# Altium PCB DC_AC_Converter.PcbDoc
Units mm, origin at the board's own origin, x right, y up, seen from the top; angles counter-clockwise.
Board outline 255.27 x 136.27 mm, 2 copper layers (Top Layer, Bottom Layer); 65 components, 30 nets, 160 pads, 2 vias.
Unrouted connection lines stored in the file: 12.
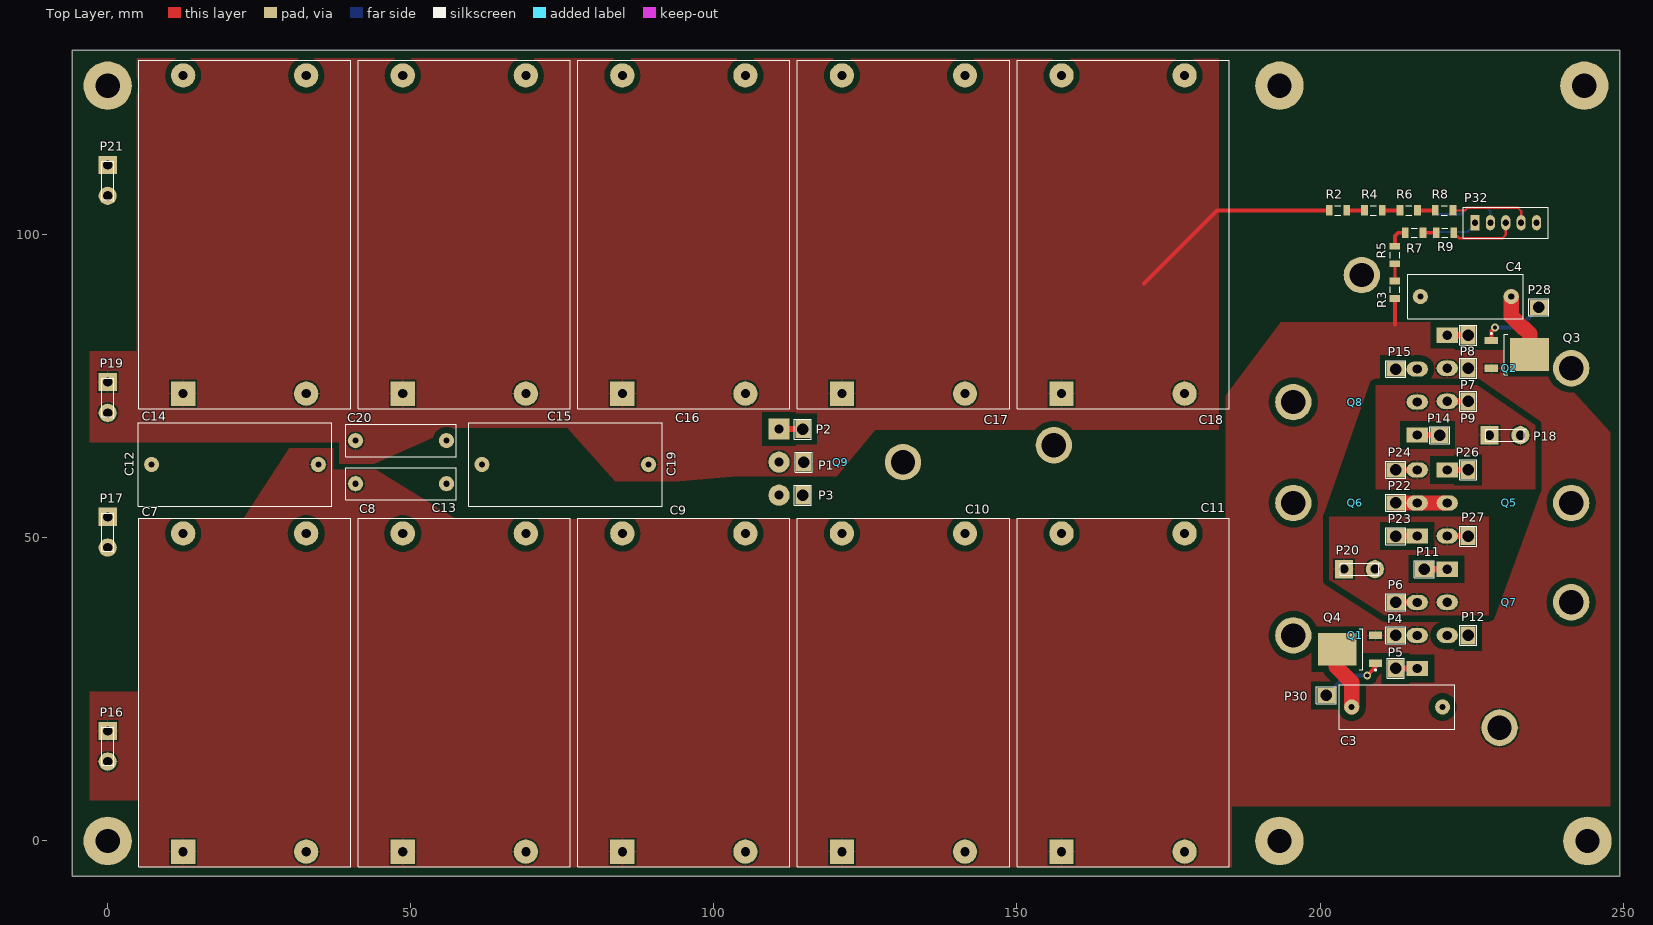
[diagram p0: Top Layer view]
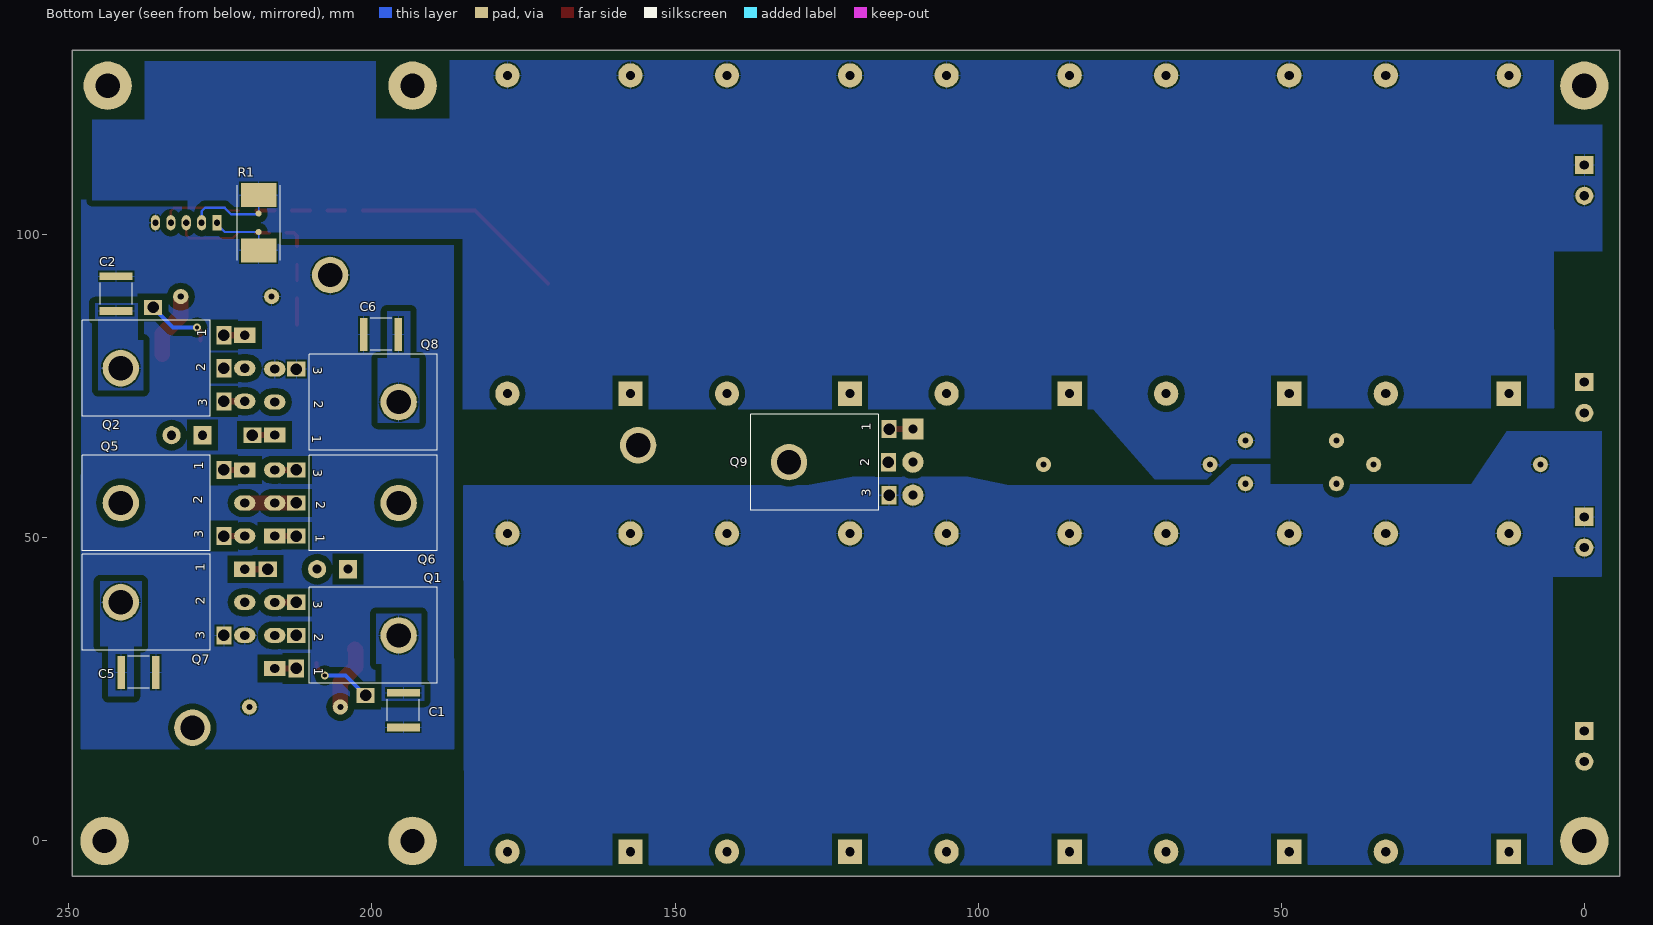
[diagram p1: Bottom Layer view, seen from below]

## Layer stack, top to bottom
Top Solder: solder mask 0.0102, Solder Resist, Dk 3.5
Top Layer: signal copper 0.0356
Dielectric1: dielectric 0.32, FR-4, Dk 4.8
Bottom Layer: signal copper 0.0356
Bottom Solder: solder mask 0.0102, Solder Resist, Dk 3.5

## Board outline
-5.842,130.429 -5.842,-5.842 249.428,-5.842 249.428,130.429

## Design rules (kind name [scope] priority, off if disabled: settings)
Clearance [All] p1: gap=1.016 ignorepadtopadclearanceinfootprint=FALSE except(0: Arc-Hole Track-Hole SMDPad-Hole THPad-Hole Via-Hole Fill-Hole Poly-Hole Region-Hole Text-Hole)
PolygonConnect [All] p1: connectstyle=Relief reliefconductorwidth=0.254 reliefentries=4 polygonreliefangle="90 Angle" airgapwidth=0.254
RoutingVias [All] p1: holewidth=0.711 width=1.27 viastyle="Through Hole" minholewidth=0.711 minwidth=1.27 maxholewidth=0.711 maxwidth=1.27
SolderMaskExpansion [All] p1: expansion=0.102 istentingtop=FALSE
Width [All] p1: maxlimit=2.54 minlimit=0.254 preferedwidth=0.254 minimp=50.000000 maximp=50.000000 favimp=50.000000
30 further rules are at their usual default settings.

## Classes and differential pairs
component class Bridge: C1 C2 C3 C4 C5 C6 Q1 Q2 Q3 Q4 Q5 Q6 Q7 Q8
component class "Bus Capacitors": C7 C8 C9 C10 C11 C12 C13 C14 C15 C16 C17 C19 C20 Q9
component class Converter_Current_Voltage_Measurement: R1 R2 R3 R4 R5 R6 R7 R8 R9
component class Main: P1 P2 P3 P4 P5 P6 P7 P8 P9 P11 P12 P14 P15 P16 P17 P18 P19 P20 P21 P22 P23 P24 P26 P27 P28 P30 P32

## Components (designator, comment, footprint, x,y, rotation, side; value= is the part's Value field where it differs from the comment)
C1 "MURATA GA355QR7GF222KW01L" Chip2PinSM127P600-8N_safety 194.818,21.59 r270 bottom
C2 "MURATA GA355QR7GF222KW01L" Chip2PinSM127P600-8N_safety 242.189,90.297 r90 bottom
C3 "EPCOS B32652A6104" "MKP  pitch:15mm size:7mm x 18mm" 220.218,22.098 r180 top
C4 "EPCOS B32652A6104" "MKP  pitch:15mm size:7mm x 18mm" 216.535,89.789 r0 top
C5 "MURATA GA355QR7GF222KW01L" Chip2PinSM127P600-8N_safety 238.506,27.813 r180 bottom
C6 "MURATA GA355QR7GF222KW01L" Chip2PinSM127P600-8N_safety 198.501,83.566 r0 bottom
C7 "EPCOS B32778G4107" "MKP DC link - High density series" 12.446,-1.778 r90 top
C8 "EPCOS B32778G4107" "MKP DC link - High density series" 48.673,-1.778 r90 top
C9 "EPCOS B32778G4107" "MKP DC link - High density series" 84.9,-1.778 r90 top
C10 "EPCOS B32778G4107" "MKP DC link - High density series" 121.126,-1.778 r90 top
C11 "EPCOS B32778G4107" "MKP DC link - High density series" 157.353,-1.778 r90 top
C12 "EPCOS B32654A6105" "MKP PITCH:27.5mm SIZE:13.5mmx31.5mm" 7.239,62.103 r0 top
C13 "EPCOS B32652A0103" "MKP PITCH:15mm SIZE:5mmx18mm" 40.894,58.928 r0 top
C14 "EPCOS B32778G4107" "MKP DC link - High density series" 12.446,73.787 r90 top
C15 "EPCOS B32778G4107" "MKP DC link - High density series" 48.673,73.787 r90 top
C16 "EPCOS B32778G4107" "MKP DC link - High density series" 84.9,73.787 r90 top
C17 "EPCOS B32778G4107" "MKP DC link - High density series" 121.126,73.787 r90 top
C18 "EPCOS B32778G4107" "MKP DC link - High density series" 157.353,73.787 r90 top
C19 "EPCOS B32654A6105" "MKP PITCH:27.5mm SIZE:13.5mmx31.5mm" 61.722,62.103 r0 top
C20 "EPCOS B32652A0103" "MKP PITCH:15mm SIZE:5mmx18mm" 55.88,66.04 r180 top
P1 "TS-101-T-AA" "SAMTEC TERMINAL/SOCKET STRIP 1 PIN new" 114.808,62.484 r0 top
P2 "TS-101-T-AA" "SAMTEC TERMINAL/SOCKET STRIP 1 PIN new" 114.681,67.945 r0 top
P3 "TS-101-T-AA" "SAMTEC TERMINAL/SOCKET STRIP 1 PIN new" 114.681,57.023 r0 top
P4 "TS-101-T-AA" "SAMTEC TERMINAL/SOCKET STRIP 1 PIN new" 212.471,33.909 r270 top
P5 "TS-101-T-AA" "SAMTEC TERMINAL/SOCKET STRIP 1 PIN new" 212.471,28.448 r180 top
P6 "TS-101-T-AA" "SAMTEC TERMINAL/SOCKET STRIP 1 PIN new" 212.471,39.37 r270 top
P7 "TS-101-T-AA" "SAMTEC TERMINAL/SOCKET STRIP 1 PIN new" 224.409,77.978 r0 top
P8 "TS-101-T-AA" "SAMTEC TERMINAL/SOCKET STRIP 1 PIN new" 224.409,83.428 r0 top
P9 "TS-101-T-AA" "SAMTEC TERMINAL/SOCKET STRIP 1 PIN new" 224.409,72.517 r0 top
P11 "TS-101-T-AA" "SAMTEC TERMINAL/SOCKET STRIP 1 PIN new" 217.17,44.831 r270 top
P12 "TS-101-T-AA" "SAMTEC TERMINAL/SOCKET STRIP 1 PIN new" 224.409,33.909 r0 top
P14 "TS-101-T-AA" "SAMTEC TERMINAL/SOCKET STRIP 1 PIN new" 219.71,66.929 r90 top
P15 "TS-101-T-AA" "SAMTEC TERMINAL/SOCKET STRIP 1 PIN new" 212.471,77.851 r90 top
P16 "Faston 5mm PCB" "FASTON 5mm PCB" 0,15.621 r270 top
P17 "Faston 5mm PCB" "FASTON 5mm PCB" 0,50.927 r270 top
P18 "Faston 5mm PCB" "FASTON 5mm PCB" 230.505,66.929 r0 top
P19 "Faston 5mm PCB" "FASTON 5mm PCB" 0,73.152 r270 top
P20 "Faston 5mm PCB" "FASTON 5mm PCB" 206.502,44.831 r0 top
P21 "Faston 5mm PCB" "FASTON 5mm PCB" 0,108.966 r270 top
P22 "TS-101-T-AA" "SAMTEC TERMINAL/SOCKET STRIP 1 PIN new" 212.471,55.753 r270 top
P23 "TS-101-T-AA" "SAMTEC TERMINAL/SOCKET STRIP 1 PIN new" 212.471,50.292 r270 top
P24 "TS-101-T-AA" "SAMTEC TERMINAL/SOCKET STRIP 1 PIN new" 212.471,61.214 r270 top
P26 "TS-101-T-AA" "SAMTEC TERMINAL/SOCKET STRIP 1 PIN new" 224.409,61.214 r0 top
P27 "TS-101-T-AA" "SAMTEC TERMINAL/SOCKET STRIP 1 PIN new" 224.409,50.292 r0 top
P28 "TS-101-T-AA" "SAMTEC TERMINAL/SOCKET STRIP 1 PIN new" 236.093,88.011 r90 top
P30 "TS-101-T-AA" "SAMTEC TERMINAL/SOCKET STRIP 1 PIN new" 201.041,24.003 r90 top
P32 "WF-5" HDR1X5 225.552,101.981 r0 top
Q1 "IPx65R110CFD" "TO-247 Horiz. Heatsink"#1 216.027,33.909 r90 top
Q2 "IPx65R110CFD" "TO-247 Horiz. Heatsink"#1 220.98,77.978 r270 top
Q3 "IPD65R950CFD" DPAK229P994X241-3N 233.553,80.264 r0 top
Q4 "IPD65R950CFD" DPAK229P994X241-3N 203.835,31.623 r180 top
Q5 "IPx65R110CFD" "TO-247 Horiz. Heatsink"#1 220.98,55.753 r270 top
Q6 "IPx65R110CFD" "TO-247 Horiz. Heatsink"#1 216.027,55.753 r90 top
Q7 "IPx65R110CFD" "TO-247 Horiz. Heatsink"#1 220.98,39.37 r270 top
Q8 "IPx65R110CFD" "TO-247 Horiz. Heatsink"#1 216.027,72.39 r90 top
Q9 "IPx65R110CFD" "TO-247 Horiz. Heatsink"#2 110.744,62.484 r270 top
R1 "Shunt Resistor Kelvin" Chip2PinSM127P600-8N 218.694,101.981 r90 bottom
R2 "Resistor SMD 1206" "RESC3116X07N - 1206" 202.946,104.013 r180 top
R3 "Resistor SMD 1206" "RESC3116X07N - 1206" 212.344,90.932 r270 top
R4 "Resistor SMD 1206" "RESC3116X07N - 1206" 208.788,104.013 r180 top
R5 "Resistor SMD 1206" "RESC3116X07N - 1206" 212.344,96.647 r270 top
R6 "Resistor SMD 1206" "RESC3116X07N - 1206" 214.63,104.013 r180 top
R7 "Resistor SMD 1206" "RESC3116X07N - 1206" 215.519,100.33 r180 top
R8 "Resistor SMD 1206" "RESC3116X07N - 1206" 220.472,104.013 r180 top
R9 "Resistor SMD 1206" "RESC3116X07N - 1206" 220.599,100.33 r180 top

## Footprints (in the part's own frame and the unit in brackets; to place one, negate y for a bottom-side part, rotate by r counter-clockwise, add the part's x,y. Pads: shape width x height; smd on the part's side, far side on the other; paste and mask are expansions set on the pad)
Chip2PinSM127P600-8N [mm] "WSR5 5W - Low inductance SMD Resistor - Kelvin terminals added"
  rect 3.94x5.84 smd: 1(-4.575,0) 4(4.575,0)
  round 1 smd: 2(-1.524,0) 3(1.524,0)
  Top Layer lines w0.254: -2.667,0 -1.524,0 ; 1.524,0 2.667,0
  silkscreen extent -6.19,-3.55 6.19,3.55, body extent -6.18,-2.8 6.18,2.79, height 2.54
Chip2PinSM127P600-8N_safety [mm] "Safety capacitor 2220 (5750 Metric)"
  rect 1.3x5.45 smd: 1(-2.85,0) 2(2.85,0)
  silkscreen extent -1.8,-2.62 1.8,2.63, body extent -3.05,-2.7 3.05,2.7, height 1.5
DPAK229P994X241-3N [mm] "D-PAK, 3-Pads, Body 6,21x6,73mm (max), IPC Medium Density"
  rect 2.2x1.2 smd: 1(-5.3,2.29) 3(-5.3,-2.29)
  rect 6.4x5.4 smd: 2(1,0)
  silkscreen extent -5.42,-3.35 -2.6,3.56, body extent -3.2,-3.37 3.02,3.37, height 2.41
"FASTON 5mm PCB" [mm] "FASTON 5mm PCB"
  rect 3x3 hole 1.5: 1(-2.54,0)
  round 3 hole 1.5: 1(2.54,0)
  silkscreen extent -3.18,-1.02 3.5,1.02
HDR1X5 [mm] "Connector; Header; 5 Position; Pitch 2.54mm"
  rect 1.5x2.5 hole 1: 1(0,0)
  oval 1.5x2.5 hole 1: 2(2.54,0) 3(5.08,0) 4(7.62,0) 5(10.16,0)
  silkscreen extent -1.91,-2.54 12.06,2.54
"MKP  pitch:15mm size:7mm x 18mm" [mm]
  round 2.5 hole 1: 1(0,0) 2(15,0)
  silkscreen extent -2.03,-3.68 17.02,3.68
"MKP DC link - High density series" [mm] "Pitch: 52.5mm w: 35mm h:50mm l:57.5mm"
  rect 4x4 hole 1.5: 1(0,0)
  round 4 hole 1.5: 2(0,-20.3) 3(52.5,0) 4(52.5,-20.3)
  silkscreen extent -2.5,-27.65 55,7.35
"MKP PITCH:15mm SIZE:5mmx18mm" [mm] "Pitch: 15 mm w: 5mm h:10.5mm l:18mm"
  round 2.5 hole 1: 1(0,0) 2(15,0)
  silkscreen extent -1.65,-2.67 16.64,2.67
"MKP PITCH:27.5mm SIZE:13.5mmx31.5mm" [mm] "Pitch: 27.5 mm w: 13.5mm h:23mm l:31.5mm"
  round 2.5 hole 1: 1(0,0) 2(27.5,0)
  silkscreen extent -2.16,-6.86 29.72,6.86
"RESC3116X07N - 1206" [mm] "Chip Resistor, 2-Leads, Body 3,05x1,60mm, IPC Medium Density"
  rect 1.1x1.75 smd: 1(-1.45,0) 2(1.45,0)
  silkscreen extent -0.5,-0.77 0.5,0.77, body extent -1.55,-0.85 1.55,0.85, height 0.65
"SAMTEC TERMINAL/SOCKET STRIP 1 PIN new" [mm] "Samtec Terminal/Socket Strip; 1 Position; Pitch 2.54mm"
  rect 2.5x3 hole 1.9: 1(0,0)
  silkscreen extent -1.4,-1.65 1.4,1.65
"TO-247 Horiz. Heatsink"#1 [mm] "TO, Thru-Hole, Horizontal, Heatsink Mounted; 3 In-Line Leads; Pitch 5.45 mm"
  round 6 hole 4: 0(0,20.447)
  rect 2.5x3.5 hole 1.5: 1(-5.45,0)
  oval 2.5x3.5 hole 1.5: 2(0,0) 3(5.45,0)
"TO-247 Horiz. Heatsink"#2 [mm] "TO, Thru-Hole, Horizontal, Heatsink Mounted; 3 In-Line Leads; Pitch 5.45 mm"
  round 6 hole 4: 0(0,20.447)
  rect 3.5x3.5 hole 1.5: 1(-5.45,0)
  round 3.5 hole 1.5: 2(0,0) 3(5.45,0)

## Part data
C1 C2 C5 C6: "Safety Standard Certified Ceramic Y2 2.2nF 250Vac"
C3 C4: "MKP High pulse (wound) 100nF 630Vdc"
C7 C8 C9 C10 C11 C14 C15 C16 C17 C18: "MKP DC link - High density series - 100uF 450V"
C12 C19: "MKP High pulse (wound) 1uF 630Vdc"
C13 C20: "MKP High pulse (wound) 10nF 1000Vdc"
P1 P2 P3 P4 P5 P6 P7 P8 P9 P11 P12 P14 P15 P22 P23 P24 P26 P27 P28 P30: "Terminal Strip, 1-Pin, 2.54mm pitch"
P32: library part "Header 5", "Header, 5-Pin, 2.54mm pitch"
Q1 Q2 Q5 Q6 Q7 Q8 Q9: "Infineon Power MOSFET N-Channel 650V 31.2A"
Q3 Q4: "Infineon Power MOSFET N-Channel 650V 11A"

## Free pads (board coordinates)
  round 6 hole 4: 0(229.616,18.669) 1(206.883,93.345) 3(156.083,65.278)
  round 8 hole 4: 3(0,0) 3(0,124.587) 3(193.294,0) 3(193.294,124.587) 3(243.586,124.587) 3(244.094,0)

## Via types
v1: diameter 1.27, hole 0.711, Top Layer to Bottom Layer, 2 vias

## Nets (pads, with @x,y where several pads share a name; then routed paths per layer and width w, separated by ;. In a path a pad name is that pad's centre, name@x,y a point inside that pad or via, vN(x,y) a via of type N, cw(c..) or ccw(c..) an arc to the next point about the centre after c; other vN are vias at no path point)
EARTH: C1.1 C2.1 C5.1 C6.1 pad.3@0,0 pad.3@0,124.587 pad.3@193.294,0 pad.3@193.294,124.587 pad.3@243.586,124.587 pad.3@244.094,0 Q1.0 Q2.0 Q5.0 Q6.0 Q7.0 Q8.0 Q9.0
NetC3_2: C3.2 Q4.2 | length 10.6
  Top Layer w2.54: Q4.2 202.692,31.48 202.692,28.702 205.218,26.176 C3.2
NetC4_2: C4.2 Q3.2 | length 10.9
  Top Layer w2.54: C4.2 231.535,86.586 233.646,84.475 233.787,84.475 234.569,83.693 234.569,80.28 Q3.2
NetC7_1: C7.1 C7.2 C8.1 C8.2 C9.1 C9.2 C10.1 C10.2 C11.1 C11.2 C12.2 C13.1 P4.1 P7.1 P16.1 pad.0 Q1.2 Q2.2 Q3.3 Q4.3 R3.2 | length 4.3
  Top Layer w0.635: 212.344,85.217 R3.2
NetC7_3: C7.3 C7.4 C8.3 C8.4 C9.3 C9.4 C10.3 C10.4 C11.3 C11.4 C12.1 C13.2 P3.1 P17.1 Q9.3
NetC14_1: C14.1 C14.2 C15.1 C15.2 C16.1 C16.2 C17.1 C17.2 C18.1 C18.2 C19.2 C20.2 P1.1 P19.1 Q9.2 R2.2 | length 35.6
  Top Layer w0.635: 170.942,91.948 183.007,104.013 R2.2
NetC14_3: C14.3 C14.4 C15.3 C15.4 C16.3 C16.4 C17.3 C17.4 C18.3 C18.4 C19.1 C20.1 P21.1 R1.4
NetP2_1: P2.1 Q9.1 | length 3.9
  Top Layer w1.016: Q9.1 110.755,67.945 P2.1
NetP5_1: P5.1 Q1.1 | length 3.5
  Top Layer w1.016: P5.1 Q1.1@216.016,28.448
NetP6_1: P6.1 P20.1 P27.1 Q1.3 Q5.3 Q7.2 | length 7
  Top Layer w1.016: P6.1 Q1.3@216.016,39.37 ; Q5.3 P27.1@224.398,50.303
NetP8_1: P8.1 Q2.1 | length 3.4
  Top Layer w1.016: Q2.1 P8.1
NetP9_1: P9.1 P18.1 P24.1 Q2.3 Q6.3 Q8.2 | length 7
  Top Layer w1.016: P24.1 Q6.3@216.016,61.214 ; Q2.3 P9.1@224.398,72.528
NetP11_1: P11.1 Q7.1 | length 3.8
  Top Layer w1.016: P11.1@217.181,44.82 Q7.1
NetP14_1: P14.1 Q8.1 | length 3.7
  Top Layer w1.016: Q8.1 P14.1@219.699,66.94
NetP22_1: P22.1 Q5.2 Q6.2 | length 8.5
  Top Layer w2.54: P22.1 Q5.2
NetP23_1: P23.1 Q6.1 | length 3.5
  Top Layer w1.016: P23.1@212.482,50.303 Q6.1
NetP26_1: P26.1 Q5.1 | length 3.4
  Top Layer w1.016: Q5.1 P26.1@224.398,61.203
NetP28_1: P28.1 Q3.1 | length 11
  Top Layer w0.635: Q3.1 228.253,84.108 v1(228.854,84.709)
  Bottom Layer w0.635: v1(228.854,84.709) 232.791,84.709 P28.1
NetP30_1: P30.1 Q4.1 | length 10.7
  Top Layer w0.635: v1(207.772,27.305) 209.135,28.668 Q4.1
  Bottom Layer w0.635: P30.1 204.343,27.305 v1(207.772,27.305)
NetP32_1: P32.1 R1.2 | length 7.6
  Bottom Layer w0.381: R1.2 224.282,100.457 225.552,101.727 P32.1
NetP32_2: P32.2 R1.3 | length 12
  Bottom Layer w0.381: R1.3@218.694,103.379 223.244,103.379 224.302,104.438 227.54,104.438 228.092,103.886 P32.2
NetP32_3: P32.3 R9.1 | length 11.2
  Top Layer w0.381: R9.1 222.938,99.441 230.124,99.441 230.632,99.949 P32.3
NetP32_4: P32.4 R8.1 | length 13.6
  Top Layer w0.381: R8.1 223.878,104.013 224.302,104.438 232.62,104.438 233.172,103.886 P32.4
NetR2_1: R2.1 R4.2 | length 2.9
  Top Layer w0.635: R2.1 R4.2
NetR3_1: R3.1 R5.2 | length 2.8
  Top Layer w0.508: R3.1 R5.2
NetR4_1: R4.1 R6.2 | length 2.9
  Top Layer w0.635: R4.1 R6.2
NetR5_1: R5.1 R7.2 | length 3.7
  Top Layer w0.635: R5.1 212.344,99.822 212.852,100.33 R7.2
NetR6_1: R6.1 R8.2 | length 2.9
  Top Layer w0.635: R6.1 R8.2
NetR7_1: R7.1 R9.2 | length 2.2
  Top Layer w0.635: R7.1 R9.2
SGND: C1.2 C2.2 C3.1 C4.1 C5.2 C6.2 P12.1 P15.1 P32.5 pad.1 Q7.3 Q8.3 R1.1

## Polygon pours and split planes (outlines as drawn)
NetC7_1 on Top Layer "Top Layer-No Net" (solid, remove dead copper, pour order 21): -2.921,6.731 5.207,6.731 5.08,6.604 5.08,-4.318 185.42,-4.318 185.42,5.715 247.904,5.715 247.904,67.437 241.808,74.041 241.935,78.613 218.948,85.598 193.548,85.598 184.404,73.406 184.404,53.086 57.531,53.086 44.323,61.214 37.211,61.214 37.211,64.77 29.972,64.77 22.479,53.213 5.08,53.213 5.207,24.638 -2.921,24.638
NetP6_1 on Top Layer "Top Layer-No Net" (solid, remove dead copper, pour order 13): 227.838,37.211 210.693,37.211 201.549,43.053 201.549,53.467 227.838,53.467
NetP9_1 on Top Layer "Top Layer-No Net" (solid, remove dead copper, pour order 12): 209.169,58.039 209.169,75.184 225.933,75.184 235.458,68.58 235.458,58.039
NetC14_1 on Top Layer "Top Layer-No Net" (solid, remove dead copper, pour order 15): -2.921,80.772 4.826,80.772 4.826,129.159 183.261,129.032 183.261,67.818 126.619,67.818 120.269,60.198 103.886,60.198 94.361,59.309 83.693,59.309 75.819,68.199 57.531,68.199 43.942,62.23 38.227,62.23 38.227,65.786 -2.921,65.786
SGND on Bottom Layer "Top Layer-No Net" (solid, remove dead copper, pour order 22): 186.475,105.791 247.985,105.791 248.031,15.113 186.436,15.113 186.475,45.019
EARTH on Bottom Layer "Top Layer-No Net" (solid, remove dead copper, pour order 18): 245.117,74.366 237.751,74.366 237.751,82.621 238.64,82.621 238.64,88.717 245.625,88.717 245.625,86.177 245.117,86.177
EARTH on Bottom Layer "Top Layer-No Net" (solid, remove dead copper, pour order 14): 191.897,37.465 199.263,37.465 199.263,29.21 198.374,29.21 198.374,23.114 191.389,23.114 191.389,25.654 191.897,25.654
EARTH on Bottom Layer "Top Layer-No Net" (solid, remove dead copper, pour order 16): 237.998,42.799 244.856,42.799 244.856,32.131 243.459,32.131 243.459,23.876 239.268,23.876 239.268,32.131 237.998,32.131
EARTH on Bottom Layer "Top Layer-No Net" (solid, remove dead copper, pour order 17): 199.009,68.961 199.009,79.629 197.485,79.629 197.485,87.376 193.675,87.376 193.675,79.629 192.151,79.629 192.151,68.961
NetC7_3 on Bottom Layer "Top Layer-No Net" (solid, remove dead copper, pour order 19): 184.912,58.674 184.785,-4.064 5.207,-3.937 5.207,43.561 -2.921,43.561 -2.917,43.941 -2.917,67.564 12.827,67.564 18.669,58.801 51.816,58.801 51.816,62.103 58.166,62.103 61.849,58.674 94.869,58.674 101.6,60.071 120.777,60.071 128.27,58.674
NetC14_3 on Bottom Layer "Top Layer-No Net" (solid, remove dead copper, pour order 20): -2.921,97.282 5.08,97.282 4.953,71.374 51.816,71.374 51.816,63.119 54.102,63.119 59.055,59.69 70.739,59.563 81.026,71.247 185.039,71.247 185.039,99.314 230.378,99.314 230.379,105.659 246.126,105.664 246.126,118.999 237.49,118.999 237.49,128.59 199.39,128.59 199.39,119.126 187.198,119.126 187.198,128.778 5.08,128.778 5.08,118.11 -2.921,118.11

## Other copper
Top Layer:
  pour cut-out: 222.758,105.791 241.173,105.791 241.173,98.171 222.758,98.171
  pour cut-out: 200.662,53.979 209.296,54.483 208.282,75.669 208.262,75.649
  pour cut-out: 228.725,36.699 228.346,57.15 235.97,57.152 236.345,57.527

## Text inside footprints (layer, text, board x,y; h text height)
Q1: Bottom Overlay "1" at 209.55,28.575 h1.5 r90; Bottom Overlay "2" at 209.55,34.163 h1.5 r90; Bottom Overlay "3" at 209.677,39.624 h1.5 r90
Q2: Bottom Overlay "1" at 227.33,83.185 h1.5 r270; Bottom Overlay "2" at 227.457,77.47 h1.5 r270; Bottom Overlay "3" at 227.203,71.628 h1.5 r270
Q5: Bottom Overlay "3" at 227.838,49.911 h1.5 r270; Bottom Overlay "2" at 227.965,55.626 h1.5 r270; Bottom Overlay "1" at 227.838,61.214 h1.5 r270
Q6: Bottom Overlay "3" at 209.677,61.341 h1.5 r90; Bottom Overlay "2" at 209.169,56.007 h1.5 r90; Bottom Overlay "1" at 209.296,50.546 h1.5 r90
Q7: Bottom Overlay "3" at 227.584,33.274 h1.5 r270; Bottom Overlay "2" at 227.584,38.989 h1.5 r270; Bottom Overlay "1" at 227.584,44.45 h1.5 r270
Q8: Bottom Overlay "3" at 209.677,78.232 h1.5 r90; Bottom Overlay "2" at 209.55,72.644 h1.5 r90; Bottom Overlay "1" at 209.804,66.929 h1.5 r90
Q9: Bottom Overlay "3" at 117.729,56.769 h1.5 r270; Bottom Overlay "2" at 117.983,61.849 h1.5 r270; Bottom Overlay "1" at 117.729,67.691 h1.5 r270